# Altium PCB SX126xMB2xAS_e588v01a.PcbDoc
Units mm, origin at the board's own origin, x right, y up, seen from the top; angles counter-clockwise.
Board outline 65 x 53.3 mm, 4 copper layers (Top Layer, MidLayer1, MidLayer2, Bottom Layer), stack 0.986 mm thick; 56 components, 39 nets, 164 pads, 790 vias.
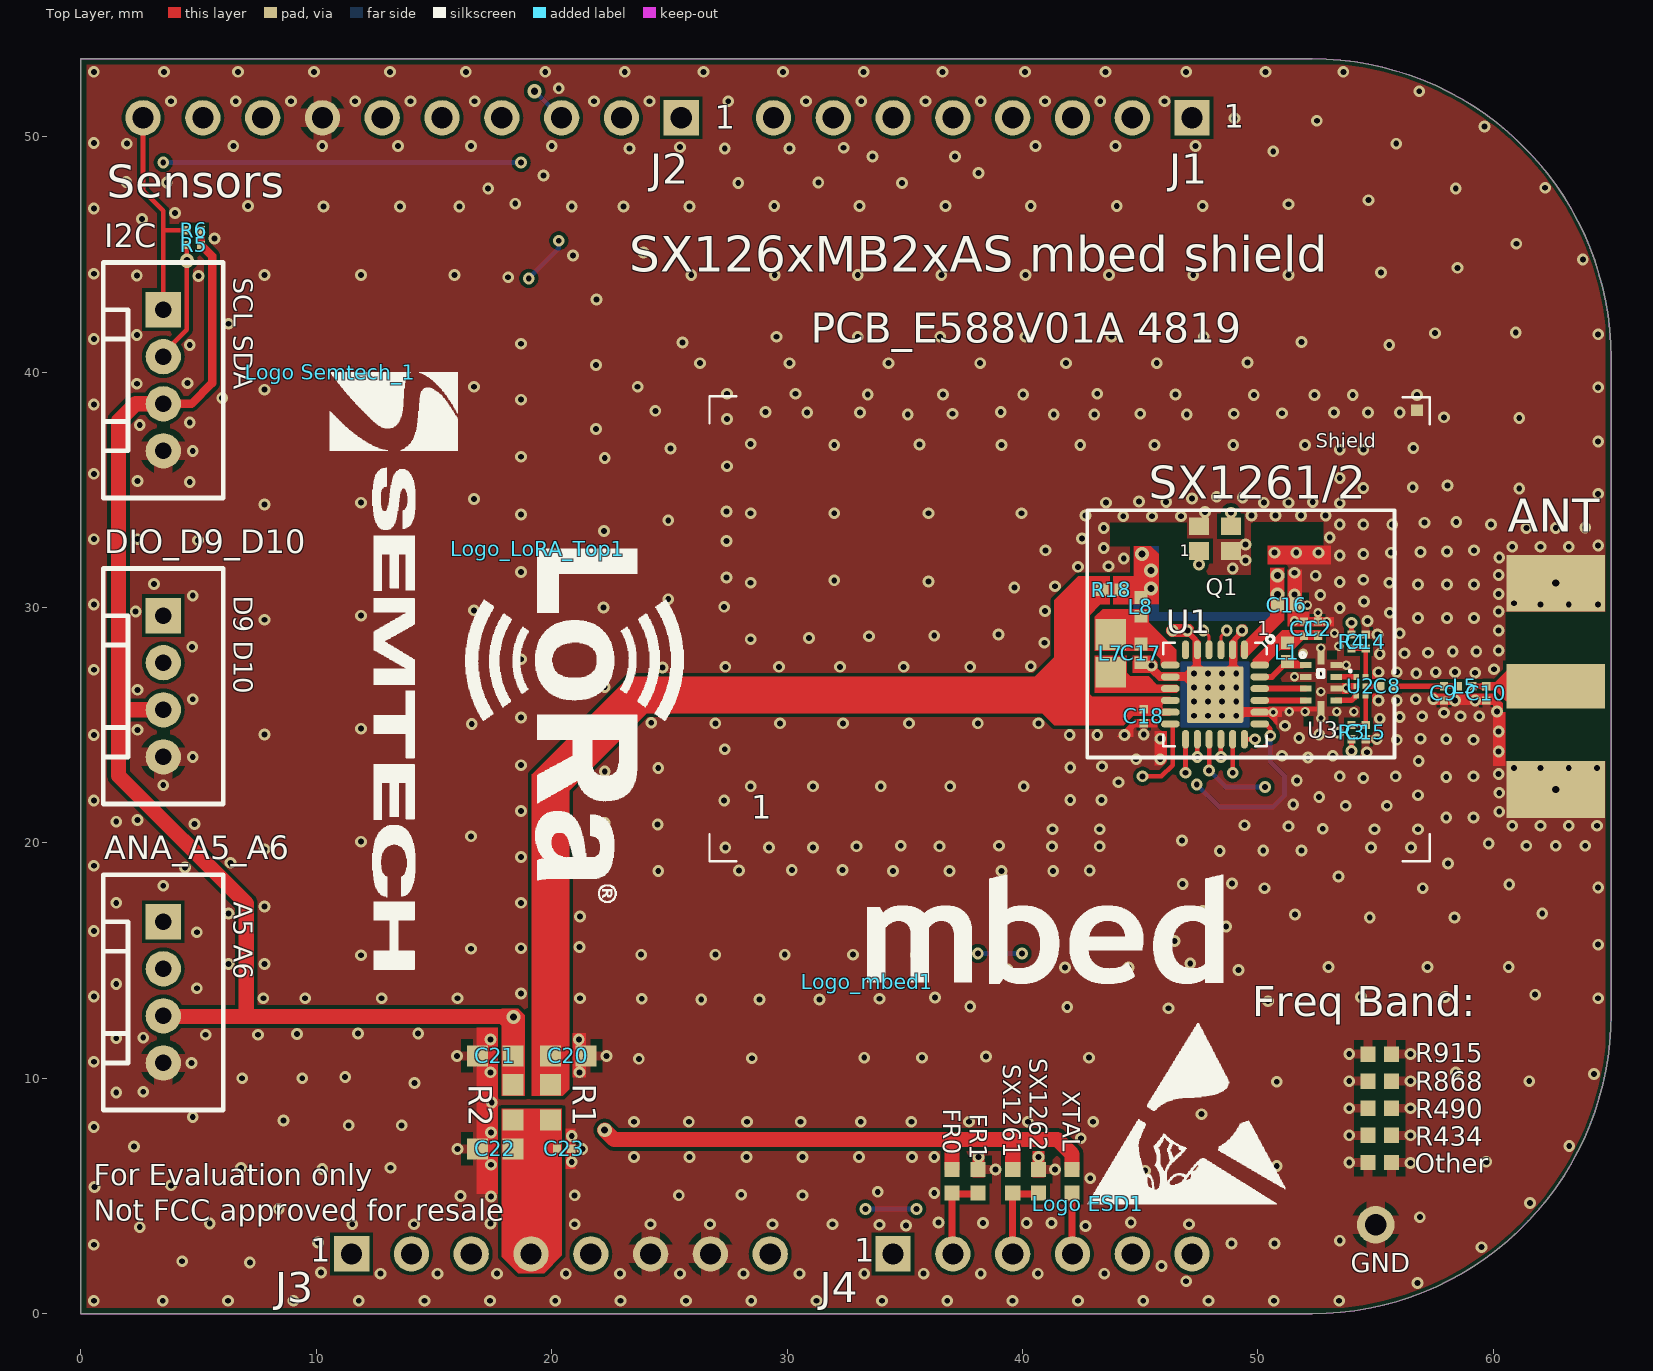
[diagram p0: Top Layer view]
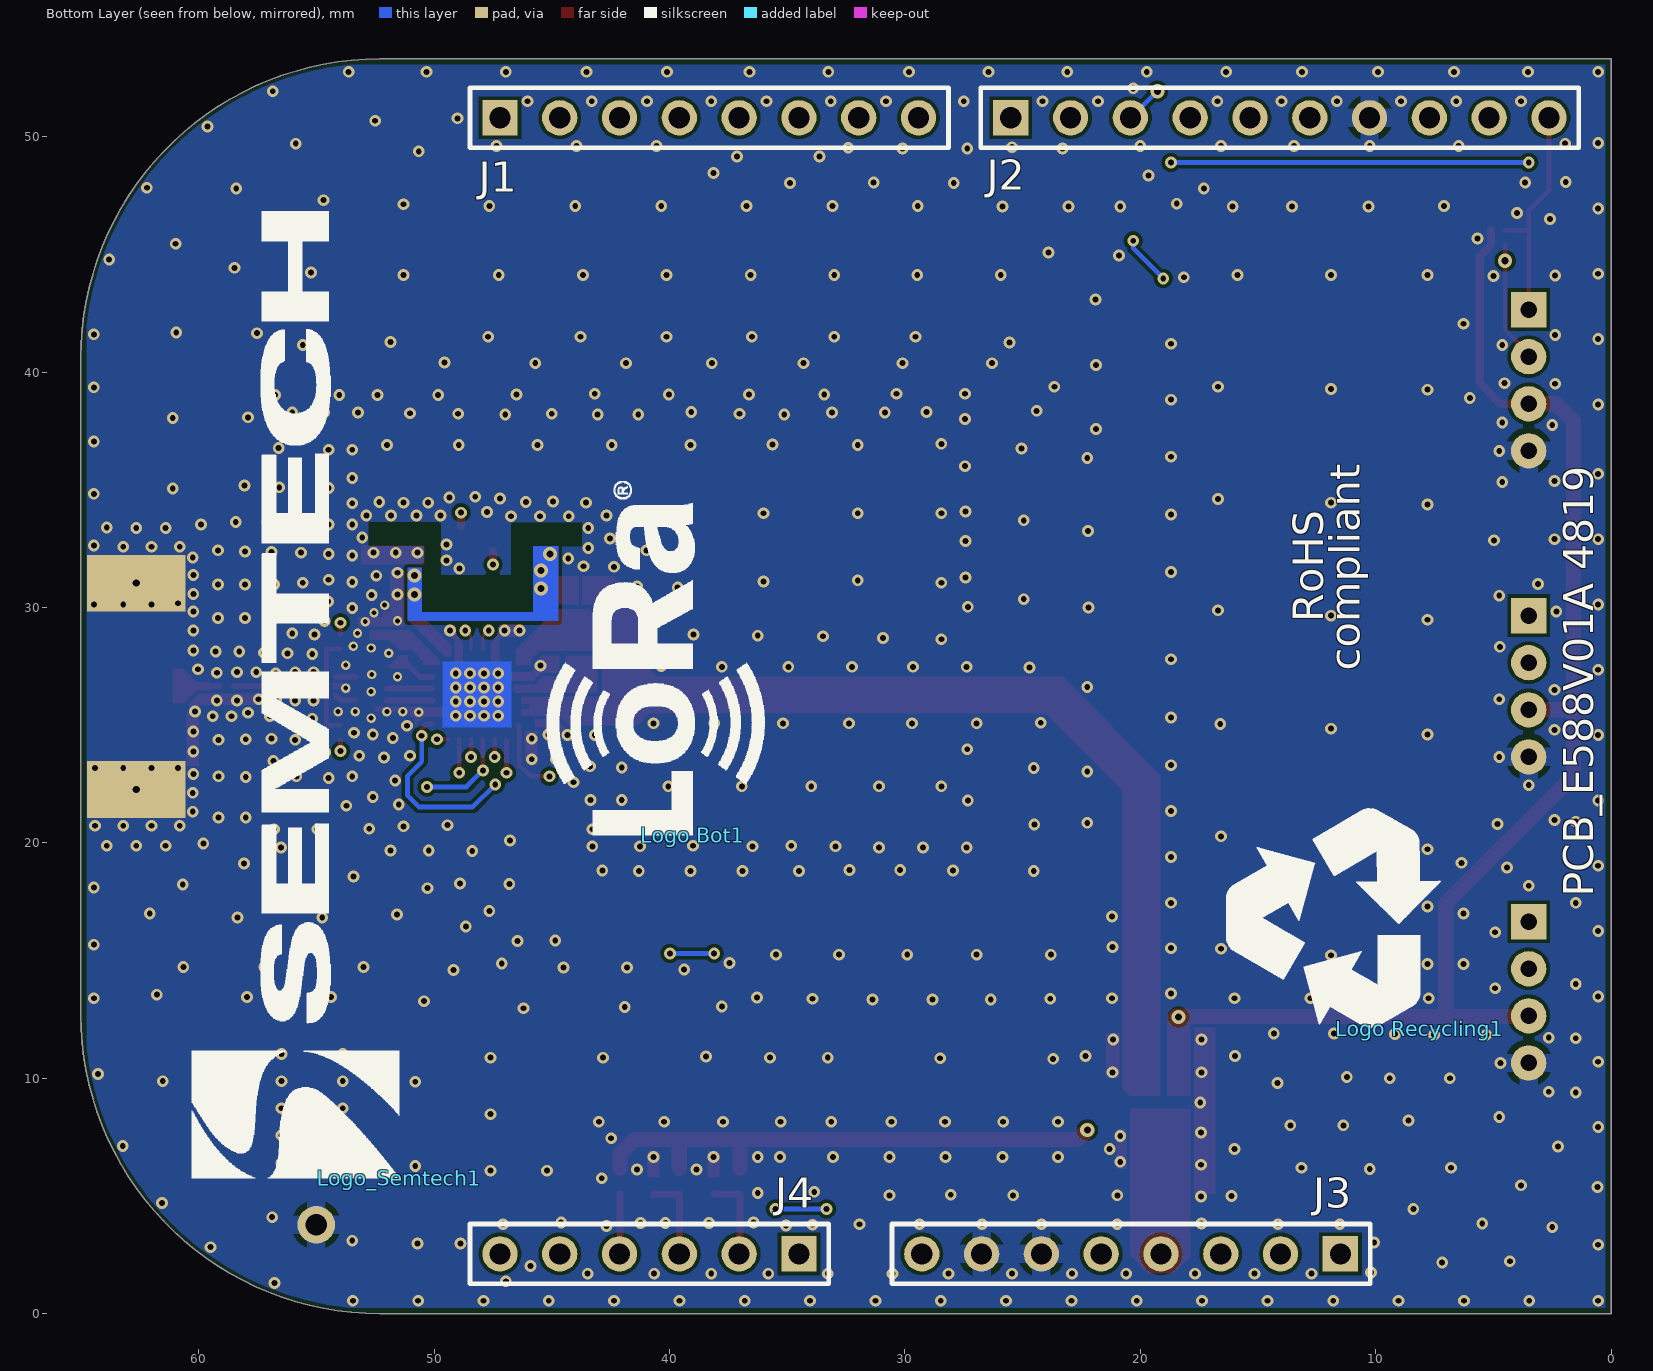
[diagram p1: Bottom Layer view, seen from below]
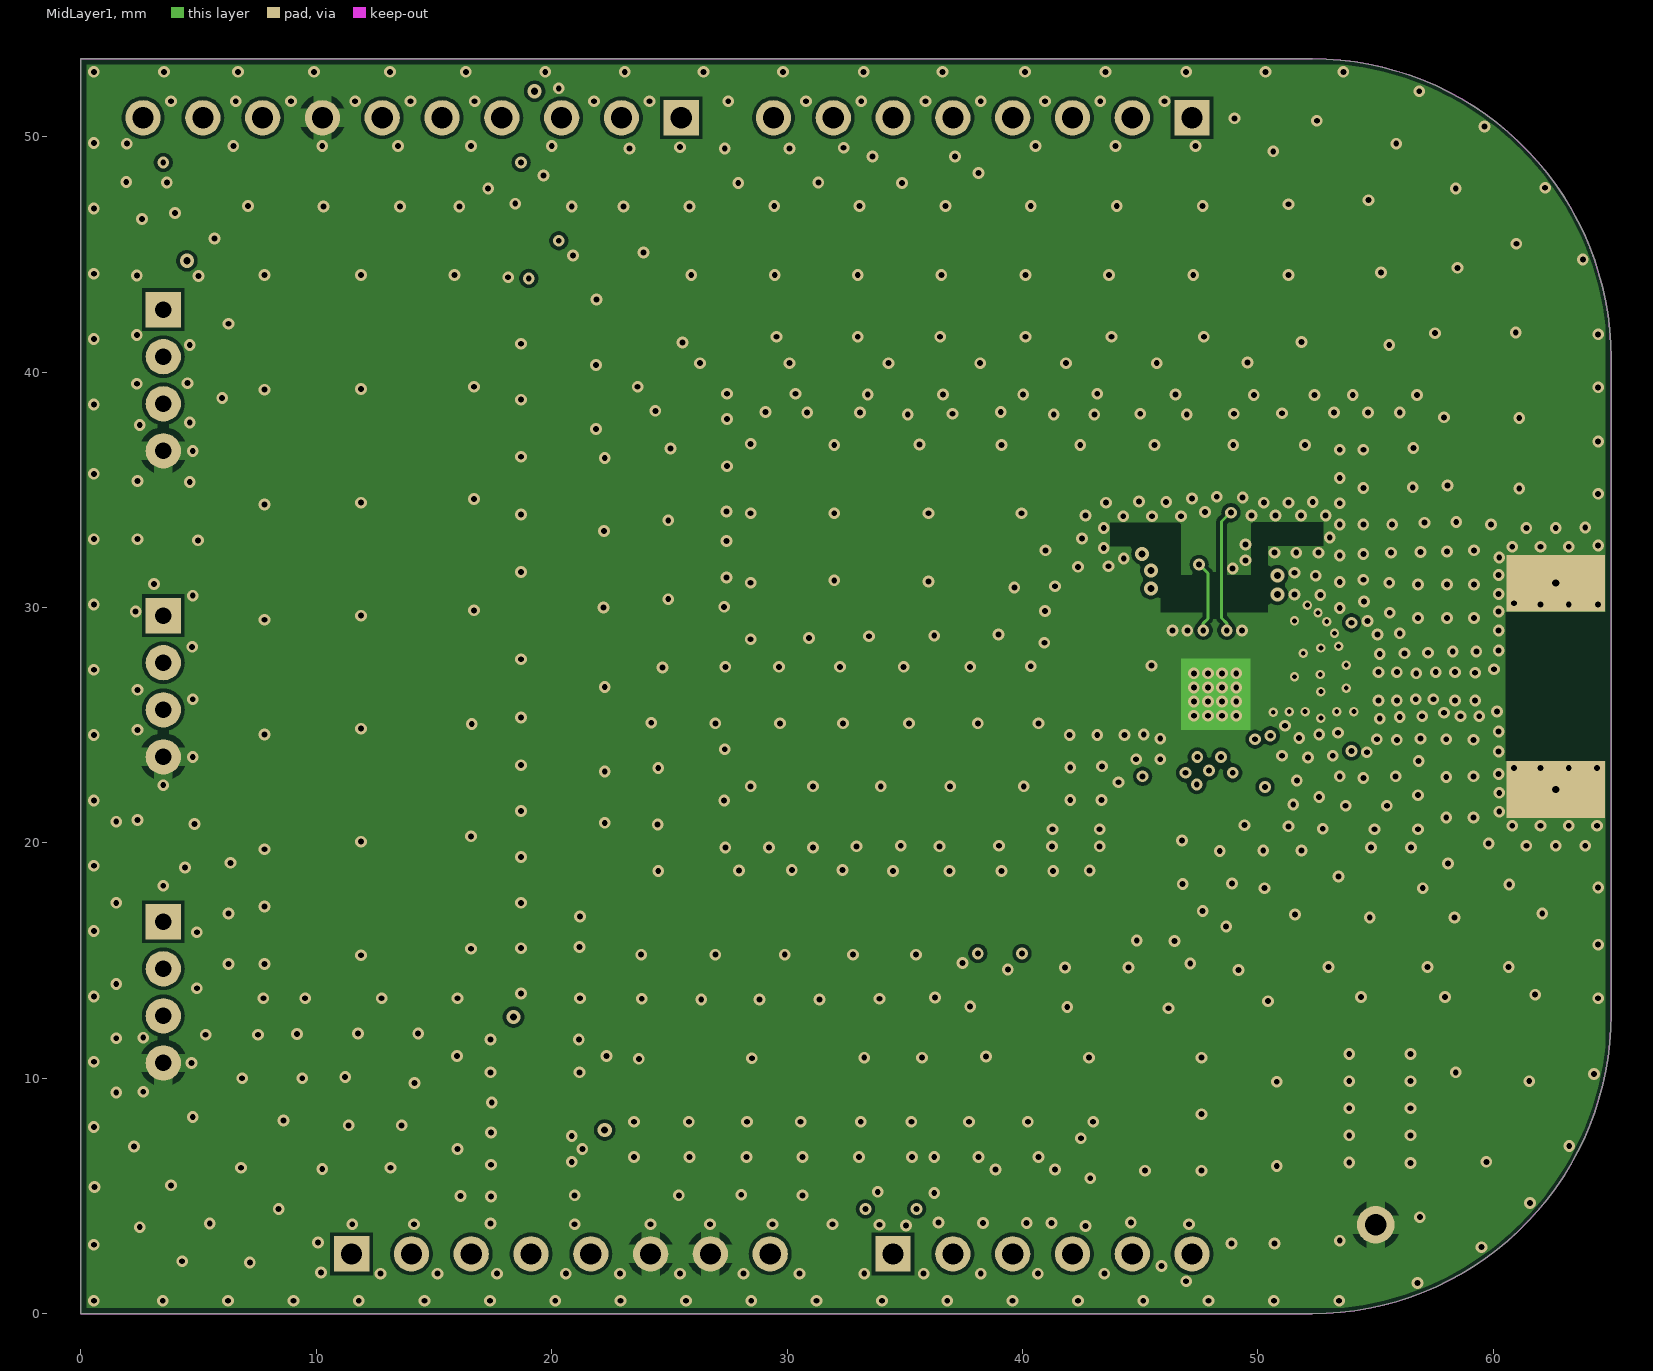
[diagram p2: MidLayer1]
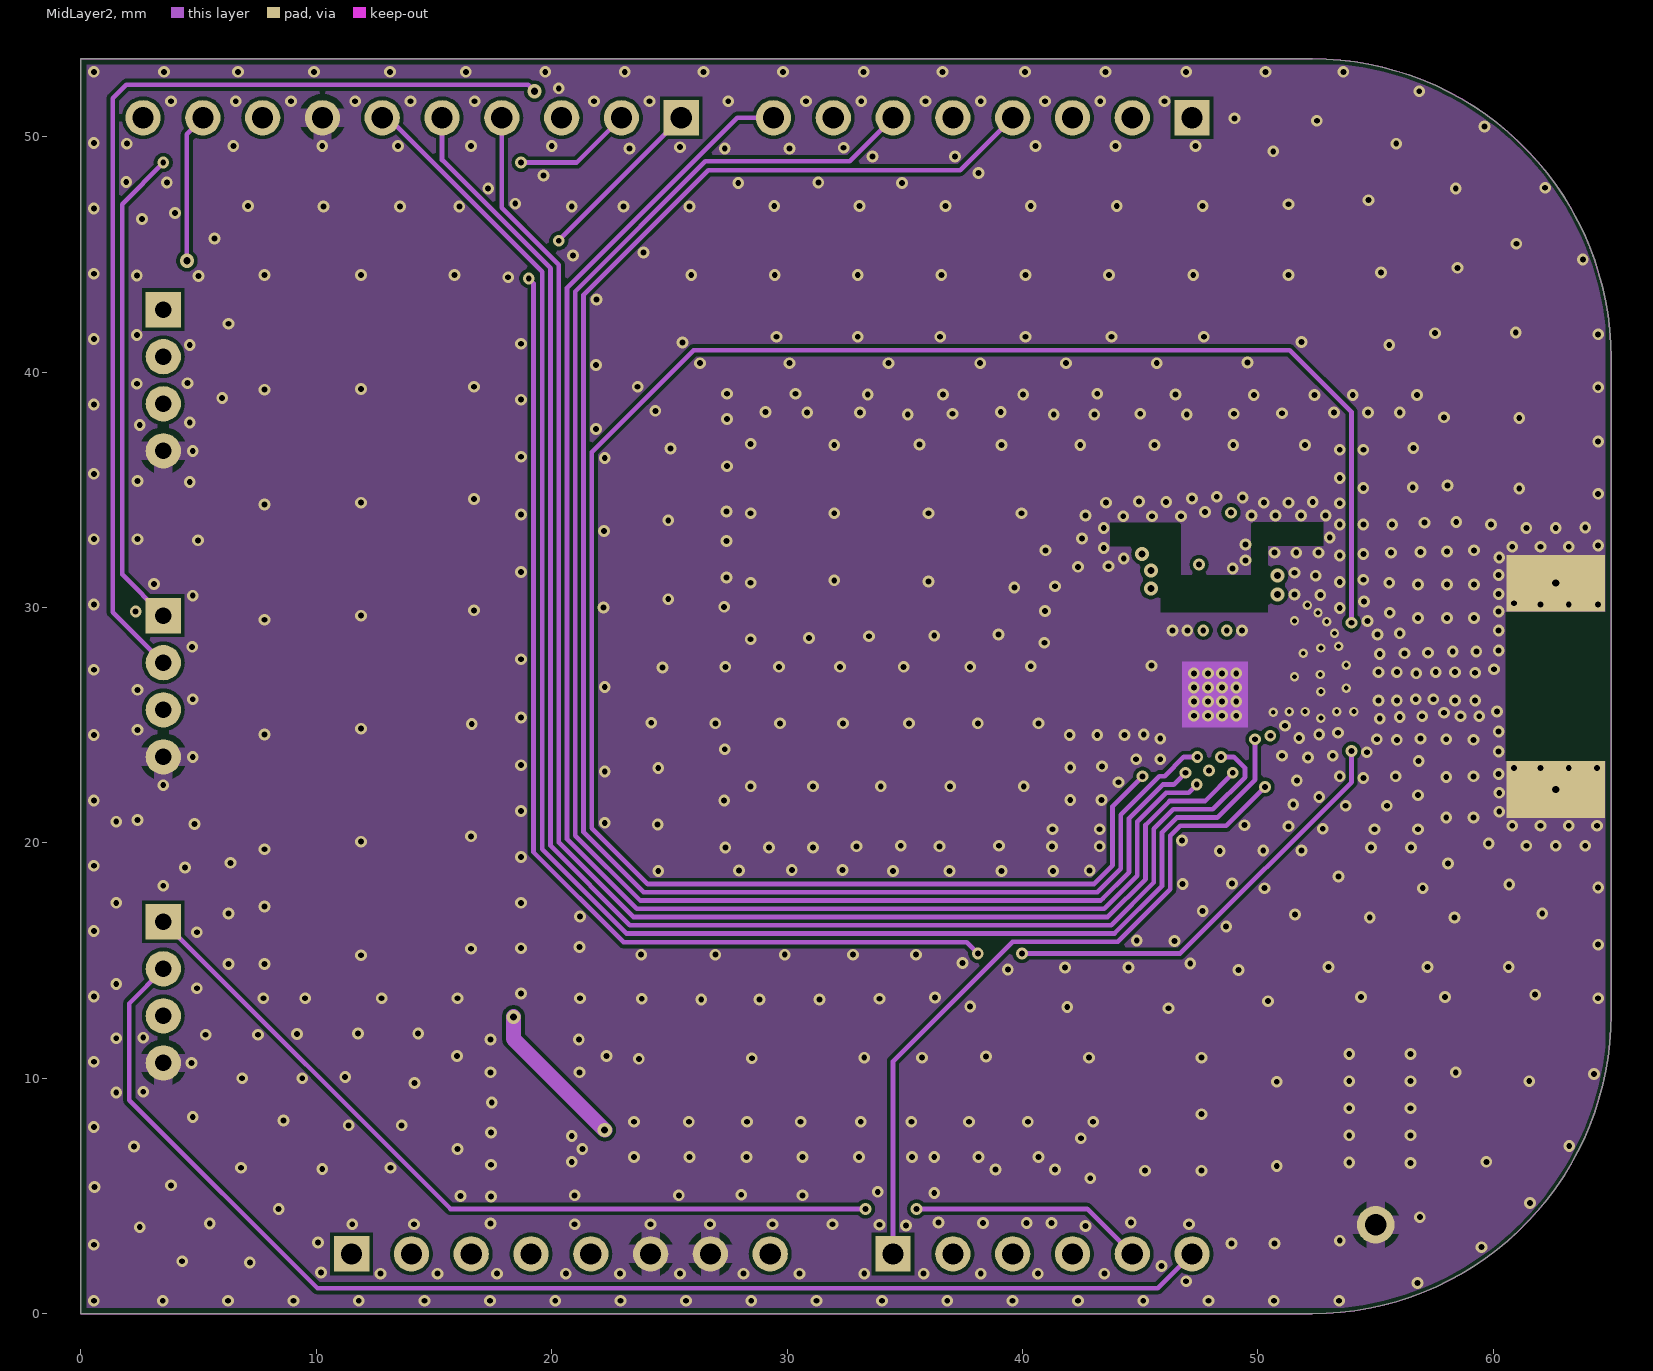
[diagram p3: MidLayer2]

## Layer stack, top to bottom
Top Solder: solder mask 0.0102, Solder Resist, Dk 3.5
Top Layer: signal copper 0.035
Dielectric1: core 0.15, FR-4, Dk 4.4
MidLayer1: signal copper 0.018
Dielectric3: prepreg 0.58, FR-4, Dk 4.4
MidLayer2: signal copper 0.018
Dielectric2: core 0.15, FR-4, Dk 4.4
Bottom Layer: signal copper 0.035
Bottom Solder: solder mask 0.0102, Solder Resist, Dk 3.5

## Board outline
0,0 52.3,0 ccw(c52.3,12.7) 65,12.7 65,40.6 ccw(c52.3,40.6) 52.3,53.3 0,53.3

## Design rules (kind name [scope] priority, off if disabled: settings)
Clearance Clearance_RF_GND [InNet('GND') And OnLayer('Top Layer') And (InPoly) vs InNet('NetL*') or InNet('NetC*') or InNet('NetU*') or InNet('NetA*') or InNet('VR_PA') or InNet('A*') or InNet('D*')] p1: gap=0.15 ignorepadtopadclearanceinfootprint=FALSE
Clearance Clearance_GND_Keepout [InNet('GND') vs OnLayer('Keep-Out Layer')] p2: gap=0.15 ignorepadtopadclearanceinfootprint=FALSE except(0: Arc-Hole Track-Hole SMDPad-Hole THPad-Hole Via-Hole Fill-Hole Poly-Hole Region-Hole Text-Hole)
Clearance Clearance_GND [InNet('GND')] p3: gap=0.15 ignorepadtopadclearanceinfootprint=FALSE
Clearance [All] p4: gap=0.15 ignorepadtopadclearanceinfootprint=FALSE except(0: Arc-Hole Track-Hole SMDPad-Hole THPad-Hole Via-Hole Fill-Hole Poly-Hole Region-Hole Text-Hole)
ComponentClearance ComponentClearance_SMA_RFIO [InComponent('RFIO')] p1: gap=0.1 collisioncheckmode=3 verticalgap=0.1 showdistances=FALSE
ComponentClearance [All] p2: gap=0.2 collisioncheckmode=3 verticalgap=0.3 showdistances=FALSE
HoleSize [All] p1: absolutevalues=TRUE maxlimit=3.6 minlimit=0.2 maxpercent=80.000 minpercent=20.000
HoleToHoleClearance [All] p1: gap=0.2 allowstackedmicrovias=TRUE
MinimumAnnularRing [All] p1: minimumring=0.1
MinimumSolderMaskSliver [All] p1: minsoldermaskwidth=0.04
PlaneClearance [All] p1: clearance=0.2
PlaneConnect [All] p1: planeconnectstyle=Direct reliefexpansion=0.508 reliefentries=4 reliefconductorwidth=0.254 reliefairgap=0.254
PolygonConnect PolygonConnect_SMD_0201 [InNet('GND') vs HasFootprint('rlc_201_smd_small') or  HasFootprint('rlc_201_smd') or  HasFootprint('TSNP-6-2')] p1: connectstyle=Relief reliefconductorwidth=0.35 reliefentries=4 polygonreliefangle="90 Angle" airgapwidth=0.125
PolygonConnect "PolygonConnect SMD" [InNet('GND') vs HasFootprint('rlc_603_smd_small') or HasFootprint('rlc_402_smd_small') or hasFootprint('rlc_805_smd_small') or HasFootprint('rlc_603_smd') or HasFootprint('rlc_402_smd') or hasFootprint('rlc_805_smd') or  hasFootprint('VQFN24_4X4MM')] p2: connectstyle=Relief reliefconductorwidth=0.4 reliefentries=4 polygonreliefangle="90 Angle" airgapwidth=0.254
PolygonConnect PolygonConnect_comp_diverse [InNet('GND') vs HasFootprint('LGM676 LED') or  HasFootprint('BRIDGE_254MM') or  HasFootprint('pin_0.9mm')  or  HasFootprint('1125S-4P_connector')   or  HasFootprint('vqfn20_3x3mm') or    HasFootprint('HDR1X8')  or  HasFootprint('HDR1X6') or  HasFootprint('HDR1X10')] p3: connectstyle=Relief reliefconductorwidth=0.8 reliefentries=4 polygonreliefangle="90 Angle" airgapwidth=0.254
PolygonConnect PolygonConnect_all [All] p4: connectstyle=Direct reliefconductorwidth=0.6 reliefentries=4 polygonreliefangle="90 Angle" airgapwidth=0.254
RoomDefinition SX126xMB2xAS_e588v01a [InComponentClass('SX126xMB2xAS_e588v01a')] p1: confinementstyle=ConfineOut formatcopy=TRUE lockcomponents=FALSE outline -10.5,78.325 -10.55,78.375 -10.55,121.325 43.45,121.325 43.3,121.175 43.3,78.325
RoutingVias [All] p1: holewidth=0.25 width=0.5 viastyle="Through Hole" minholewidth=0.2 minwidth=0.4 maxholewidth=0.3 maxwidth=0.6
SilkToSilkClearance [All] p1: silktosilkclearance=0.05
SilkToSolderMaskClearance SilkscreenOverComponentPads [IsPad] p1: minsilkscreentomaskgap=0.05 clearancetoexposedcopper=TRUE
SolderMaskExpansion [All] p1: expansion=0.05
Width "Width GND" [InNet('GND')] p1: maxlimit=3 minlimit=0.2 preferedwidth=0.4
Width Width_VCC [InNet('VDD') or  InNet('VDISPLAY') or  InNet('VDD_MBED')  or  InNet('VUSB')  or  InNet('VDD_3V3')] p2: maxlimit=2 minlimit=0.2 preferedwidth=0.8
Width "Width All" [All] p3: maxlimit=2 minlimit=0.127 preferedwidth=0.2
22 further rules are at their usual default settings.

## Components (designator, comment, footprint, x,y, rotation, side; value= is the part's Value field where it differs from the comment)
ANA_A5_A6 "Header 4" 1125S-4P_connector 3.5,16.65 r270 top locked
ANT "SMA" SMA_end_launch_1.0mm_9.52mm 62.65,26.65 r0 top locked
C1 "Cap" rlc_201_smd 51.95,29.1 r270 top value=VAL?
C2 "Cap" RLC_201_SMD 52.55,29.1 r270 top value=VAL?
C8 "Cap" RLC_201_SMD 55.5,26.65 r180 top value=VAL?
C9 "Cap" rlc_201_smd 57.9,26.35 r90 top value=VAL?
C10 "Cap" rlc_201_smd 59.7,26.35 r90 top value=VAL?
C14 "Cap" RLC_201_SMD 54.575,28.55 r90 top value=1nF
C15 "Cap" RLC_201_SMD 54.575,24.7 r270 top value=1nF
C16 "Cap" rlc_402_smd_small 51.225,30.1 r180 top value=VAL?
C17 "Cap" rlc_402_smd_small 45.025,28.05 r90 top value=470nF
C18 "Cap" RLC_201_SMD 45.15,25.375 r90 top value=100nF
C20 "Cap" RLC_603_SMD 20.7,10.95 r180 top value=1uF
C21 "Cap" RLC_603_SMD 17.6,10.95 r0 top value=1uF
C22 "Cap" RLC_603_SMD 17.6,7 r0 top value=10uF
C23 "Cap" RLC_201_SMD 20.525,7 r180 top value=100nF
DIO_D9_D10 "Header 4" 1125S-4P_connector 3.5,29.65 r270 top locked
FR0 "Resistor" RLC_402_SMD 37,5.625 r270 top value=1k
FR1 "Resistor" RLC_402_SMD 38.111,5.625 r270 top value=NC
GND "Test Pin" pin_0.9mm 51.45,9.775 r90 top
I2C "Header 4" 1125S-4P_connector 3.5,42.65 r270 top locked
J1 "Header 8" HDR1X8 47.2,50.8 r180 bottom locked
J2 "Header 10" HDR1X10 25.5,50.8 r180 bottom locked
J3 "Header 8" HDR1X8 11.5,2.54 r0 bottom locked
J4 "Header 6" HDR1X6 34.5,2.54 r0 bottom locked
L1 "Inductor" rlc_402_smd_small 51.25,28.1 r90 top value=VAL?
L5 "Inductor" rlc_201_smd 58.8,26.65 r0 top value=VAL?
L7 "Inductor" rlc_805_smd_small 43.75,28.05 r270 top value=15uH
L8 "Inductor" rlc_402_smd_small 45.025,30.025 r270 top value=VAL?
"Logo Bot1" "Logo symbol" "Logo LoRa Size4" 39,20.325 r90 bottom
"Logo ESD1" "Logo symbol" "Logo ESD" 42.775,4.674 r0 top
"Logo Recycling1" "Logo symbol" "Logo Recycling1" 8.125,12.1 r90 bottom
"Logo Semtech_1" "Logo symbol" logo_semtech_horiz_size3 10.6,40 r270 top locked
Logo_LoRA_Top1 "Logo symbol" "Logo LoRa Size4" 19.4,32.5 r270 top locked
Logo_mbed1 "Logo symbol" "logo mbed 2" 33.4,14.1 r0 top
Logo_Semtech1 "Logo symbol" logo_semtech_horiz_size4 51.475,5.75 r90 bottom
Other "Resistor" RLC_402_SMD 55.175,6.425 r180 top value=NC
Q1 "Xtal" nd2016da 48.175,32.925 r0 top value=32.0MHz
R1 "Resistor" RLC_603_SMD 19.95,8.975 r270 top value=0R
R2 "Resistor" RLC_603_SMD 18.35,8.975 r270 top value=0R
R3 "Resistor" RLC_201_SMD 53.975,24.7 r270 top value=100R
R4 "Resistor" RLC_201_SMD 53.975,28.55 r90 top value=100R
R5 "Resistor" RLC_201_SMD 4.8,45.4 r0 top value=3.3k
R6 "Resistor" RLC_201_SMD 4.8,46.025 r0 top value=3.3k
R18 "Resistor" rlc_402_smd_small 43.775,30.75 r180 top value=0R
R434 "Resistor" RLC_402_SMD 55.175,7.575 r0 top value=NC
R490 "Resistor" RLC_402_SMD 55.175,8.725 r180 top value=NC
R868 "Resistor" RLC_402_SMD 55.175,9.875 r0 top value=NC
R915 "Resistor" RLC_402_SMD 55.175,11.025 r180 top value=NC
Shield "Logo symbol" "BMIS-209-F - Shield" 56.75,38.375 r180 top locked
SX1261 "Resistor" RLC_402_SMD 39.58,5.625 r270 top value=NC
SX1262 "Resistor" RLC_402_SMD 40.675,5.625 r270 top value=10k
U1 "SX1261/2" VQFN24_4X4MM 48.175,26.3 r270 top
U2 "BGS12SN6 RF Switch" TSNP-6-2 54.375,26.65 r0 top
U3 "0900FM15D0039" "IPD FILTER" 52.675,26.8 r270 top
XTAL "Resistor" RLC_402_SMD 42.1,5.625 r270 top value=1k

## Footprints (in the part's own frame and the unit in brackets; to place one, negate y for a bottom-side part, rotate by r counter-clockwise, add the part's x,y. Pads: shape width x height; smd on the part's side, far side on the other; paste and mask are expansions set on the pad)
1125S-4P_connector [mm] "Connector; Header; 4 Position; P/N: 1125S-4P; Manuf: TAIFENG"
  rect 1.5x1.5 hole 0.7 mask+0.05: 1(0,0)
  round 1.5 hole 0.7 mask+0.05: 2(2,0) 3(4,0) 4(6,0)
  silkscreen extent -2,-2.55 8,2.55, body extent -2,-2.55 8,2.55, height 2.95
"BMIS-209-F - Shield" [mm] "BMIS-209-F EMI Gasket - modif SolderMask - Standard Surface Mount Shields -  Laird Technologies"
  rect 0.5x0.5 smd paste-1 mask+0.05: 1(0,0)
  Mechanical 15 keep-out lines w1: 29.5,18.6 29.5,0 0,0 0,18.6 29.5,18.6
  silkscreen extent -0.55,-0.6 30.05,19.15, body extent -0.3,-0.3 0.3,0.3, height 0.8
HDR1X6 [mm] "Connector; Header; 6 Position"
  rect 1.5x1.5 hole 0.9: 1(0,0)
  round 1.5 hole 0.9: 2(2.54,0) 3(5.08,0) 4(7.62,0) 5(10.16,0) 6(12.7,0)
  silkscreen extent -1.27,-1.27 13.97,1.27, body extent -0.8,-0.8 13.5,0.8
HDR1X8 [mm] "Connector; Header; 8 Position"
  rect 1.5x1.5 hole 0.9: 1(0,0)
  round 1.5 hole 0.9: 2(2.54,0) 3(5.08,0) 4(7.62,0) 5(10.16,0) 6(12.7,0) 7(15.24,0) 8(17.78,0)
  silkscreen extent -1.27,-1.27 19.05,1.27, body extent -0.8,-0.8 18.58,0.8
HDR1X10 [mm] "Connector; Header; 10 Position"
  rect 1.5x1.5 hole 0.9: 1(0,0)
  round 1.5 hole 0.9: 2(2.54,0) 3(5.08,0) 4(7.62,0) 5(10.16,0) 6(12.7,0) 7(15.24,0) 8(17.78,0) 9(20.32,0) 10(22.86,0)
  silkscreen extent -1.27,-1.27 24.13,1.27, body extent -0.8,-0.8 23.66,0.8
"IPD FILTER" [mm] "IPD Filter; Johanson; Body 2.00 x 1.25 mm (LxW max)"
  rect 0.25x0.5 smd mask+0.025: 1(-0.75,-0.65) 2(-0.25,-0.65) 3(0.25,-0.65) 4(0.75,-0.65) 6(0.75,0.65) 7(0.25,0.65) 8(-0.25,0.65) 9(-0.75,0.65)
  rect 0.6x0.3 smd mask+0.025: 5(1.075,0) 10(-1.075,0)
  silkscreen extent -1.27,-0.87 -0.23,0.12, body extent -1,-0.63 1,0.63, height 0.6
"Logo ESD" [mm] "Logo ESD"
  silkscreen extent 0,0 8.38,7.67
"Logo LoRa Size4" [mm] "Logo LoRa Size4 - Top Overlay - 18x9.5mm - Registered"
  silkscreen extent 0,-3.05 15.04,6.2
"logo mbed 2" [mm] "logo mbed 2"
  silkscreen extent 0,-0.06 15.12,4.54
"Logo Recycling1" [mm] "Logo Recycling1"
  silkscreen extent 0.05,-0.88 9.36,8.2
logo_semtech_horiz_size3 [mm] "Logo semtech horizontal - size3 - L"
  silkscreen extent 0,0 25.4,5.41
logo_semtech_horiz_size4 [mm] "Logo semtech horizontal - size4 - XL"
  silkscreen extent 0,0 41.07,8.79
nd2016da [mm] "Crystal SMD 2.0x1.6mm"
  rect 0.85x0.75 smd mask+0.05: 1(-0.675,-0.525) 2(0.675,-0.525) 3(0.675,0.525) 4(-0.675,0.525)
  body extent -1,-0.8 1,0.8, height 1
pin_0.9mm [mm] "Generic Pin 0.9mm; 1 Lead"
  round 1.6 hole 0.9 mask+0.05: 1(-6,-3.55)
rlc_201_smd [mm] "Chip SMD component 201; Body 0.6 x 0.3 mm (LxW typ)"
  rect 0.35x0.35 smd paste+0 mask+0.025: 1(-0.3,0) 2(0.3,0)
  body extent -0.3,-0.15 0.3,0.15, height 0.5
RLC_201_SMD [mm] "Chip SMD component 201; Body 0.6 x 0.3 mm (LxW typ)"
  rect 0.35x0.35 smd paste+0 mask+0.025: 1(-0.3,0) 2(0.3,0)
  body extent -0.3,-0.15 0.3,0.15, height 0.5
RLC_402_SMD [mm] "Chip SMD component 402; Body 1.0 x 0.5 mm (LxW typ)"
  rect 0.65x0.65 smd mask+0.05: 1(-0.5,0) 2(0.5,0)
  body extent -0.5,-0.25 0.5,0.25, height 0.6
rlc_402_smd_small [mm] "Chip SMD component 402; Body 1.0 x 0.5 mm (LxW typ);small footprint"
  rect 0.55x0.55 smd mask+0.025: 1(-0.4,0) 2(0.4,0)
  body extent -0.5,-0.25 0.5,0.25, height 0.6
RLC_603_SMD [mm] "Chip SMD component 603; Body 1.6 x 0.8mm (LxW typ)"
  rect 0.9x0.9 smd paste+0 mask+0.05: 1(-0.75,0) 2(0.75,0)
  body extent -0.8,-0.4 0.8,0.4, height 0.9
rlc_805_smd_small [mm] "Chip SMD component 805; Body 2.0 x 1.25 mm (LxW typ); small footprint"
  rect 1.3x1.3 smd mask+0.05: 1(-0.8,0) 2(0.8,0)
  body extent -1,-0.63 1,0.63, height 1
SMA_end_launch_1.0mm_9.52mm [mm] "SMA end launch for 1.0mm PCB thickness; 9.52mm"
  rect 4.2x1.905 smd mask+0.05: 1(0,0)
  rect 4.2x2.413 hole 0.3 mask+0.05: 2(0,-4.38) 2(0,4.38)
TSNP-6-2 [mm] "TSNP-6-2; Body 1.1 x 0.7 mm (LxW typ)"
  rect 0.25x0.25 smd paste-0.025 mask+0.025: 1(-0.2,0.4) 2(-0.2,0) 3(-0.2,-0.4) 4(0.2,-0.4) 5(0.2,0) 6(0.2,0.4)
  silkscreen extent -0.5,0.6 -0.4,0.7, body extent -0.35,-0.55 0.35,0.55, height 0.45
VQFN24_4X4MM [mm] "24 Leads, Body 4.0x4.0mm, Pitch 0.50mm, VQFN24"
  oval 0.8x0.3 smd mask+0.05: 1(-1.9,1.25) 2(-1.9,0.75) 3(-1.9,0.25) 4(-1.9,-0.25) 5(-1.9,-0.75) 6(-1.9,-1.25) 13(1.9,-1.25) 14(1.9,-0.75) 15(1.9,-0.25) 16(1.9,0.25) 17(1.9,0.75) 18(1.9,1.25)
  oval 0.3x0.8 smd mask+0.05: 7(-1.25,-1.9) 8(-0.75,-1.9) 9(-0.25,-1.9) 10(0.25,-1.9) 11(0.75,-1.9) 12(1.25,-1.9) 19(1.25,1.9) 20(0.75,1.9) 21(0.25,1.9) 22(-0.25,1.9) 23(-0.75,1.9) 24(-1.25,1.9)
  rrect5% 2.4x2.4 smd paste-2.5 mask+0.05: 25(0,0)
  Mechanical 15 keep-out lines w0.1: 2.5,-2.5 2.5,2.5 -2.5,2.5 -2.5,-2.5 2.5,-2.5
  silkscreen extent -2.5,-2.2 2.2,2.5, body extent -2,-2 2,2, height 1

## Part data
ANA_A5_A6 DIO_D9_D10 I2C: "Header, 4-Pin", LatestRevisionDate=17-Jul-2002, LatestRevisionNote="Re-released for DXP Platform.", Publisher="Altium Limited"
ANT: "SMA Straight Connector", LatestRevisionDate="05-oct-2007  -  Semtech", LatestRevisionNote="Re-released for DXP Platform.", Publisher="Altium Limited"
C1 C2 C8 C9 C10 C14 C15 C16 C17 C18 C20 C21 C22 C23: "Capacitor SMD", LatestRevisionDate="05-oct-2007  -  Semtech", LatestRevisionNote="Re-released for DXP Platform.", Published=8-Jun-2000, Publisher="Altium Limited"
FR0 FR1 Other R1 R2 R3 R4 R5 R6 R18 R434 R490 R868 R915 SX1261 SX1262 XTAL: "Resistor SMD - IEC symbol version", LatestRevisionDate="27-Jul-20  -  Semtech"
GND: library part test_pin, LatestRevisionDate="05-oct-2007  -  Semtech"
J1 J3: "Header, 8-Pin", LatestRevisionDate=17-Jul-2002, LatestRevisionNote="Re-released for DXP Platform.", Publisher="Altium Limited"
J2: "Header, 10-Pin", LatestRevisionDate=17-Jul-2002, LatestRevisionNote="Re-released for DXP Platform.", Publisher="Altium Limited"
J4: "Header, 6-Pin", LatestRevisionDate=17-Jul-2002, LatestRevisionNote="Re-released for DXP Platform.", Publisher="Altium Limited"
L1 L5 L7 L8: "Inductor SMD", Code_IEC=1005, Code_JEITA=0402, LatestRevisionDate="05-oct-2007  -  Semtech", LatestRevisionNote="Re-released for DXP Platform.", Published=8-Jun-2000, Publisher="Altium Limited"
"Logo Bot1" "Logo ESD1" "Logo Recycling1" "Logo Semtech_1" Logo_LoRA_Top1 Logo_mbed1 Logo_Semtech1: library part Logo, "Schematic symbol for Logo"
Q1: library part "Xtal GND", "Crystal with GND pins", LatestRevisionDate="05-oct-2007  -  Semtech"
Shield: library part Shield, "Shield - EMI Gasket - Standard Surface Mount Shields"
U1: library part SX126x, "SX1262- Ultra low power RF transceiver"
U2: "BGS12SN6 Infineon RF Switch", LatestRevisionDate="03-Sep-2012 -  Semtech"
U3: library part "IPD filter", "0900FM15D0039 - Johanson IPD Filter for SX1261, SX1262", LatestRevisionDate="05-oct-2007  -  Semtech"

## Via types
v1: diameter 0.5, hole 0.25, Top Layer to Bottom Layer, tented both sides, 762 vias
v2: diameter 0.4, hole 0.2, Top Layer to Bottom Layer, tented both sides, 19 vias
v3: diameter 0.6, hole 0.3, Top Layer to Bottom Layer, tented both sides, 9 vias

## Nets (pads, with @x,y where several pads share a name; then routed paths per layer and width w, separated by ;. In a path a pad name is that pad's centre, name@x,y a point inside that pad or via, vN(x,y) a via of type N, cw(c..) or ccw(c..) an arc to the next point about the centre after c; other vN are vias at no path point)
A5: ANA_A5_A6.1 J4.5 | length 47
  Top Layer w0.2: v1(35.5,4.45) v1@35.5,4.475
  MidLayer2 w0.2: ANA_A5_A6.1 15.7,4.45 v1(33.325,4.45) ; v1(35.5,4.45) 42.75,4.45 J4.5@44.65,2.55
  Bottom Layer w0.2: v1(33.325,4.45) v1(35.5,4.45)
A6: ANA_A5_A6.2 J4.6 | length 55.3
  MidLayer2 w0.2: ANA_A5_A6.2@3.525,14.65 2.05,13.175 2.05,9.075 10.05,1.075 45.735,1.075 J4.6
ANT_SW: J2.1 R3.2 | length 75.4
  Top Layer w0.2: v1(53.975,23.9) R3.2
  MidLayer2 w0.2: v1(19.025,43.975) 19.225,43.775 19.225,19.6 23.05,15.775 37.625,15.775 v1(38.1,15.3) v1@38.05,15.3 ; v1(20.3,45.575) 20.3,45.6 J2.1 ; v1(39.975,15.3) 46.7,15.3 53.975,22.575 v1(53.975,23.9)
  Bottom Layer w0.2: v1@19.025,44 v1(19.025,43.975) 20.3,45.25 v1(20.3,45.575) ; v1(38.1,15.3) v1(39.975,15.3)
BUSY: J1.4 U1.14 | length 75.9
  Top Layer w0.2: v1@47.425,23.575 U1.14
  MidLayer2 w0.2: J1.4 37.355,48.575 26.65,48.575 21.35,43.275 21.35,20.45 23.9,17.9 43.175,17.9 43.244,17.969 ; 43.18,17.9 44.175,18.895 44.175,21.193 45.807,22.825 46.032,22.825 46.857,23.65 v1(47.425,23.65)
D9: DIO_D9_D10.1 J2.2 | length 41
  MidLayer2 w0.2: DIO_D9_D10.1 1.75,31.4 1.75,47.125 v1@3.55,48.925 ; v1(18.7,48.9) 21.06,48.9 22.95,50.79 J2.2@22.95,50.8
  Bottom Layer w0.2: v1(3.5,48.9) v1(18.7,48.9)
D10: DIO_D9_D10.2 J2.3 | length 44.9
  MidLayer2 w0.2: DIO_D9_D10.2@3.5,27.796 DIO_D9_D10.2 1.35,29.8 1.35,51.625 1.925,52.2 19,52.2 v3(19.275,51.925)
  Bottom Layer w0.2: v3(19.275,51.925) 19.285,51.925 20.41,50.8 J2.3
DIO1: J1.6 U1.13 | length 71.9
  Top Layer w0.2: v1(46.925,22.975) U1.13
  MidLayer2 w0.2: J1.6 32.65,48.95 26.53,48.95 21,43.42 21,20.305 23.755,17.55 43.325,17.55 ; 43.422,17.647 43.325,17.55 ; v1(46.925,22.975) 46.425,22.475 45.952,22.475 44.525,21.048 44.525,18.75 43.325,17.55
DIO2: R4.2 U1.12 | length 91.5
  Top Layer w0.2: v1(45.1,22.825) 45.9,22.825 46.375,23.3 46.375,24.95 U1.12@46.413,24.988 ; R4.2 v1(53.975,29.35)
  MidLayer2 w0.2: 43.035,18.25 43.025,18.25 ; v1(45.1,22.825) 43.825,21.55 43.825,19.05 43.025,18.25 ; v1(53.975,29.35) 53.975,38.3 51.35,40.925 26.025,40.925 21.7,36.6 21.7,20.625 24.075,18.25 43.025,18.25
DIO3: U1.6
GND: ANA_A5_A6.4 ANT.2 C1.1 C2.1 C9.1 C10.1 C14.2 C15.2 C16.1 C17.1 C18.1 C20.1 C21.1 C22.1 C23.1 DIO_D9_D10.4 FR1.1 GND.1 I2C.4 J2.7 J3.6 J3.7 Other.1 Other.2 Q1.2 Q1.4 R434.1 R434.2 R490.1 R490.2 R868.1 R868.2 R915.1 R915.2 Shield.1 SX1262.1 U1.2 U1.5 U1.8 U1.20 U1.25 U2.2 U3.2 U3.5 U3.7 U3.9 U3.10 | length 0.1
  Top Layer w0.3: U1.25@49.075,25.5 U1.25@49.125,25.55
  other v1: 0.55,0.55 3.475,0.55 6.25,0.55 9.025,0.55 11.8,0.55 14.6,0.55 17.375,0.55 20.15,0.55 22.925,0.55 25.7,0.55 28.475,0.55 31.25,0.55 34.025,0.55 36.8,0.55 39.575,0.55 42.35,0.55 45.125,0.55 47.9,0.55 50.675,0.55 53.45,0.55 56.775,1.3 46.95,1.375 12.725,1.7 15.15,1.7 17.675,1.7 20.6,1.7 22.9,1.7 25.45,1.7 28.15,1.7 30.525,1.7 33.275,1.7 35.8,1.7 38.225,1.7 40.65,1.7 43.475,1.7 10.2,1.75 45.9,2.025 7.175,2.175 4.3,2.225 59.5,2.825 0.55,2.925 48.875,2.975 50.7,2.975 10.075,3.025 53.475,3.1 2.5,3.675 42.675,3.725 35.05,3.75 33.925,3.775 11.525,3.8 14.15,3.8 20.975,3.8 24.2,3.8 26.725,3.8 29.375,3.8 31.925,3.8 47.075,3.8 5.475,3.825 17.4,3.825 38.325,3.85 40.175,3.85 41.225,3.85 36.425,3.875 44.6,3.875 56.875,4.1 8.4,4.45 61.55,4.7 17.425,4.975 16.125,5 20.975,5.025 25.4,5.025 30.65,5.025 28.05,5.05 36.25,5.125 33.85,5.175 0.575,5.375 3.825,5.45 42.875,5.75 45.2,6.075 47.6,6.075 38.85,6.125 41.375,6.125 10.25,6.15 6.8,6.2 13.15,6.2 50.8,6.275 17.425,6.325 56.475,6.4 53.875,6.425 20.85,6.45 59.7,6.45 23.5,6.65 25.85,6.65 28.275,6.65 30.65,6.65 33.05,6.65 35.3,6.65 36.25,6.65 38.125,6.65 40.675,6.65 16,7 21.3,7 2.25,7.1 63.225,7.125 42.475,7.45 20.85,7.55 53.875,7.575 56.475,7.575 17.425,7.7 0.55,7.925 11.375,8 13.625,8 23.5,8.15 25.825,8.15 28.3,8.15 30.575,8.15 33.125,8.15 35.275,8.15 37.725,8.15 40.225,8.15 43,8.15 8.6,8.2 4.75,8.35 47.6,8.475 53.875,8.725 56.475,8.725 17.45,8.975 1.5,9.4 2.65,9.425 14.175,9.8 50.8,9.85 53.875,9.875 56.475,9.875 61.525,9.875 6.85,10 9.4,10 11.225,10.05 64.275,10.175 17.4,10.25 21.175,10.25 58.4,10.25 4.7,10.65 0.55,10.7 23.7,10.825 28.5,10.85 33.275,10.875 35.725,10.875 42.825,10.875 47.6,10.875 38.45,10.925 15.975,10.95 22.325,10.95 53.875,11.025 56.475,11.025 17.4,11.65 21.15,11.65 1.5,11.7 2.65,11.725 5.3,11.85 7.525,11.85 9.175,11.875 11.775,11.9 14.325,11.9 46.2,12.975 41.9,13.025 37.775,13.05 50.425,13.275 26.35,13.35 28.825,13.35 31.375,13.35 23.825,13.375 33.925,13.375 7.75,13.4 9.525,13.4 12.775,13.4 16,13.4 21.2,13.4 64.45,13.4 36.275,13.425 54.375,13.45 57.95,13.45 0.55,13.475 61.775,13.55 18.7,13.6 4.925,13.825 1.5,14 49.175,14.6 39.375,14.625 41.8,14.7 44.5,14.7 53,14.725 57.2,14.725 60.65,14.725 6.275,14.85 7.8,14.85 47.125,14.875 37.45,14.9 11.9,15.225 23.8,15.25 26.95,15.25 29.9,15.25 32.8,15.25 35.475,15.25 16.575,15.5 18.7,15.525 21.175,15.575 64.45,15.675 46.45,15.825 44.85,15.85 4.925,16.2 0.55,16.25 48.65,16.45 54.75,16.825 58.35,16.825 21.2,16.875 51.575,16.95 6.275,17 62.075,17 47.65,17.1 7.8,17.3 1.5,17.45 18.7,17.45 50.275,18.075 57,18.075 64.45,18.1 3.5,18.175 60.675,18.225 46.8,18.25 48.9,18.275 53.425,18.575 24.525,18.8 34.5,18.8 36.9,18.8 39.1,18.8 41.3,18.8 27.95,18.825 42.85,18.825 30.2,18.85 32.35,18.85 4.425,18.95 0.55,19.025 58.075,19.125 6.35,19.15 18.7,19.4 48.375,19.65 50.225,19.675 51.85,19.675 7.8,19.725 27.375,19.8 29.225,19.8 31.1,19.8 54.8,19.8 56.5,19.8 32.95,19.85 36.475,19.85 41.25,19.85 43.275,19.85 34.825,19.875 39,19.875 61.4,19.875 62.65,19.875 63.9,19.875 59.8,19.975 11.9,20.05 46.775,20.1 16.575,20.275 41.275,20.575 43.275,20.575 54.95,20.575 56.8,20.575 52.75,20.6 51.3,20.7 60.8,20.725 62,20.725 63.2,20.725 64.4,20.725 49.425,20.75 24.5,20.775 4.825,20.8 22.25,20.85 1.5,20.9 2.4,20.975 58,21.075 59.15,21.075 60.25,21.325 18.7,21.35 53.725,21.575 55.475,21.575 51.5,21.625 0.55,21.8 27.325,21.8 42.025,21.825 43.35,21.825 52.6,21.95 56.8,22.025 60.25,22.125 28.45,22.4 31.1,22.4 33.975,22.4 36.925,22.4 40.05,22.4 3.5,22.45 44.075,22.575 51.65,22.65 54.475,22.75 58,22.8 53.475,22.825 55.85,22.825 59.15,22.825 60.225,22.925 22.25,23.025 24.525,23.175 60.875,23.175 62,23.175 63.2,23.175 64.4,23.175 42.025,23.2 43.375,23.25 18.7,23.3 56.825,23.475 44.825,23.55 45.85,23.55 52.125,23.625 4.75,23.65 51.025,23.7 53.175,23.7 54.625,23.85 60.225,23.875 27.35,23.975 55.9,24.375 59.15,24.375 55.05,24.4 58,24.4 45.85,24.425 56.9,24.425 51.75,24.45 0.55,24.575 42,24.575 43.175,24.575 44.325,24.575 7.8,24.6 45.15,24.6 52.6,24.6 53.4,24.675 60.225,24.725 2.4,24.8 11.9,24.85 51.15,24.975 16.6,25.05 26.95,25.075 29.7,25.075 32.375,25.075 35.175,25.075 38.1,25.075 40.675,25.075 24.225,25.1 55.175,25.275 18.7,25.325 56.025,25.35 56.975,25.375 58.6,25.375 59.4,25.375 47.275,25.4 47.875,25.4 48.475,25.4 49.075,25.4 57.9,25.525 60.15,25.575 47.275,26 47.875,26 48.475,26 49.075,26 55.125,26.05 55.9,26.05 58.375,26.05 59.225,26.05 4.75,26.1 56.7,26.1 57.45,26.1 2.4,26.5 47.275,26.6 47.875,26.6 48.475,26.6 49.075,26.6 22.25,26.625 47.275,27.2 47.875,27.2 48.475,27.2 49.075,27.2 56.725,27.2 59.225,27.225 55.125,27.25 55.9,27.25 57.55,27.25 58.375,27.25 0.55,27.35 60.025,27.375 24.7,27.45 27.375,27.475 29.65,27.475 32.25,27.475 34.95,27.475 37.775,27.475 40.35,27.5 45.475,27.525 18.7,27.8 55.175,28.025 56.225,28.05 57.225,28.075 58.275,28.125 59.275,28.125 60.225,28.175 4.725,28.325 40.925,28.5 28.45,28.65 30.925,28.7 33.475,28.775 36.25,28.8 38.975,28.85 55.075,28.85 56.025,28.9 46.375,29.025 47,29.025 49.325,29.025 60.225,29.025 54.65,29.425 7.8,29.475 56.8,29.55 58.025,29.55 59.175,29.55 11.9,29.65 55.6,29.775 2.325,29.825 60.225,29.825 40.95,29.85 16.7,29.875 53.475,29.975 22.2,30 27.325,30.025 0.55,30.125 62,30.125 63.2,30.125 64.45,30.125 60.875,30.175 54.5,30.25 24.95,30.35 4.75,30.5 52.65,30.525 51.55,30.55 60.225,30.575 39.65,30.85 41.375,30.9 56.8,30.975 58.025,30.975 59.175,30.975 3.1,31 28.45,31.05 55.575,31.05 53.475,31.075 36,31.1 32,31.15 54.475,31.175 27.425,31.275 52.45,31.35 60.225,31.375 51.55,31.475 18.7,31.5 48.925,31.65 42.35,31.725 43.65,31.75 49.475,32 44.3,32.075 60.25,32.125 53.475,32.2 54.475,32.275 50.7,32.325 51.625,32.325 52.575,32.325 55.65,32.325 56.9,32.35 58.025,32.375 40.975,32.425 59.175,32.425 43.45,32.525 60.8,32.575 62,32.575 63.2,32.575 64.45,32.625 49.475,32.675 27.425,32.825 4.975,32.85 0.55,32.9 2.4,32.9 42.525,32.925 53.05,32.975 22.225,33.25 43.45,33.375 61.4,33.375 62.65,33.375 63.9,33.4 53.475,33.525 54.475,33.525 55.7,33.525 59.9,33.525 57.075,33.6 58.425,33.625 24.95,33.7 44.275,33.875 45.5,33.875 46.725,33.875 42.675,33.9 49.725,33.9 50.75,33.9 51.825,33.9 52.875,33.9 18.7,33.95 28.45,34 32,34 36,34 39.95,34 47.75,34.05 27.425,34.075 7.8,34.375 53.475,34.425 11.9,34.45 43.55,34.45 50.25,34.45 51.3,34.45 46.1,34.475 52.325,34.475 44.95,34.5 16.7,34.6 47.2,34.625 49.35,34.675 48.25,34.7 64.45,34.825 61.1,35.05 54.475,35.075 56.575,35.1 58.05,35.175 4.625,35.325 2.4,35.375 53.475,35.5 0.55,35.675 27.45,36 22.25,36.35 18.7,36.4 4.75,36.65 53.475,36.7 54.475,36.7 25.05,36.75 56.6,36.775 32,36.9 39.1,36.9 42.45,36.9 45.6,36.9 48.95,36.9 52,36.9 35.625,36.925 28.45,36.95 64.45,37.05 21.875,37.575 2.5,37.75 4.625,37.85 27.45,38 61.1,38.05 57.9,38.075 35.125,38.2 41.325,38.2 43.05,38.2 46.975,38.2 37.025,38.225 45,38.225 48.975,38.225 51.025,38.25 30.85,38.275 33.1,38.275 53.225,38.275 54.675,38.275 56.025,38.275 29.075,38.3 39.075,38.3 24.4,38.35 0.55,38.625 18.7,38.825 6,38.9 49.825,39.025 52.4,39.025 54.025,39.025 56.75,39.025 33.425,39.05 36.625,39.05 40.025,39.05 46.5,39.05 27.45,39.075 30.35,39.075 43.175,39.075 7.8,39.25 11.9,39.275 64.45,39.35 16.7,39.375 23.65,39.375 2.375,39.5 4.525,39.525 21.875,40.3 26.3,40.375 30.1,40.375 34.3,40.375 38.2,40.375 41.85,40.375 45.7,40.375 49.55,40.4 4.625,41.15 55.575,41.15 18.7,41.2 25.55,41.25 51.85,41.275 0.55,41.4 29.55,41.5 33,41.5 36.5,41.5 40.125,41.5 43.775,41.5 47.7,41.5 2.375,41.575 64.45,41.6 57.525,41.65 60.95,41.675 6.275,42.05 21.9,43.075 18.15,44.025 5,44.075 2.375,44.1 7.8,44.125 11.9,44.125 15.875,44.125 25.925,44.125 29.475,44.125 33,44.125 36.55,44.125 40.125,44.125 43.675,44.125 47.25,44.125 51.3,44.125 0.55,44.175 55.225,44.225 58.475,44.425 63.8,44.775 20.9,44.95 23.9,45.075 60.975,45.45 5.675,45.675 2.6,46.5 4,46.75 0.55,46.95 10.3,47.025 13.55,47.025 16.075,47.025 20.85,47.025 23.05,47.025 25.85,47.025 7.1,47.05 29.45,47.05 33.075,47.05 36.725,47.05 40.35,47.05 44,47.05 47.65,47.05 51.3,47.125 18.45,47.15 54.7,47.3 17.3,47.8 58.4,47.8 62.2,47.825 27.925,48.025 34.875,48.025 3.65,48.05 31.325,48.05 1.925,48.075 19.65,48.35 38.125,48.45 33.625,49.15 37.125,49.15 50.65,49.375 23.3,49.5 27.35,49.5 30.1,49.5 32.4,49.525 25.45,49.55 6.475,49.6 10.25,49.6 13.475,49.6 16.575,49.6 20,49.6 40.55,49.6 43.95,49.6 47.35,49.6 1.95,49.7 55.875,49.7 0.55,49.725 59.625,50.425 52.5,50.675 49,50.775 3.825,51.5 6.575,51.5 8.925,51.5 11.65,51.5 14,51.5 16.725,51.5 21.8,51.5 24.15,51.5 27.5,51.5 30.8,51.5 33.15,51.5 35.875,51.5 38.225,51.5 40.95,51.5 43.3,51.5 46.025,51.5 56.85,51.925 20.3,52.05 0.55,52.75 3.525,52.75 6.675,52.75 9.9,52.75 13.125,52.75 16.35,52.75 19.725,52.75 23.1,52.75 26.45,52.75 29.825,52.75 33.25,52.75 36.6,52.75 40.1,52.75 43.525,52.75 46.95,52.75 50.325,52.75 53.625,52.75
  other v2: 52.675,25.3 50.65,25.55 51.325,25.575 52,25.575 53.35,25.575 54.075,25.575 52.675,26.425 53.75,26.575 51.55,27.05 52.65,27.15 53.75,27.55 51.925,28.05 52.675,28.275 53.425,28.35 53.25,28.9 52.925,29.4 51.55,29.425 52.55,29.775 52.1,30.1
I2C_SCL: I2C.1 J2.10 R6.1 | length 9.5
  Top Layer w0.2: 2.64,47.7 J2.10 ; 2.65,47.7 3.5,46.85 3.5,46.025 ; I2C.1 3.5,46.025 ; R6.1 3.5,46.025
I2C_SDA: I2C.2 J2.9 R5.1 | length 11.5
  Top Layer w0.2: I2C.2 3.5,40.796 4.5,41.796 v3(4.5,44.725) R5.1
  MidLayer2 w0.2: v3(4.5,44.725) 4.5,50.1 J2.9@5.175,50.775
MISO: J2.5 U1.16 | length 71
  Top Layer w0.2: v1(48.425,23.65) U1.16
  MidLayer2 w0.2: J2.5 15.34,49.01 19.95,44.4 19.95,19.87 23.32,16.5 27.175,16.5 ; 26.25,16.5 43.76,16.5 45.575,18.315 45.575,20.597 46.403,21.425 48.084,21.425 49.45,22.791 49.45,23.175 48.975,23.65 v1(48.425,23.65) v1@48.425,23.578 ; v1@48.425,23.575 v1@48.428,23.578
MOSI: J2.4 U1.17 | length 69
  Top Layer w0.2: v1(48.927,22.975) U1.17@48.927,24.398
  MidLayer2 w0.2: J2.4 17.875,50.795 17.875,46.975 20.3,44.55 20.3,20.015 23.465,16.85 25.725,16.85 ; 23.825,16.85 43.615,16.85 45.225,18.46 45.225,20.758 46.242,21.775 47.75,21.775 v1@48.95,22.975
NetANT_1: ANT.1 C10.2 L5.2 | length 0.6
  Top Layer w0.24: L5.2 C10.2
NetC8_1: C8.1 C9.2 L5.1 | length 2.7
  Top Layer w0.24: C8.1 C9.2 L5.1
NetC8_2: C8.2 U2.5 | length 0.6
  Top Layer w0.24: U2.5 C8.2
NetC14_1: C14.1 R4.1 U2.6 | length 1.8
  Top Layer w0.2: R4.1 C14.1 U2.6
NetC15_1: C15.1 R3.1 U2.4 | length 1.9
  Top Layer w0.2: R3.1 C15.1 U2.4
NetC16_2: C16.2 L8.1 R18.1 U1.1
  other v3: 50.825,30.55 45.45,30.8 50.825,31.35 45.45,31.575 45.075,32.275
NetC17_2: C17.2 L7.1 L8.2 U1.7
NetFR0_2: FR0.2 FR1.2 J4.2 | length 3.7
  Top Layer w0.3: J4.2 37,2.58 37,5.075 FR1.2@38.111,5.075
NetJ4_3: J4.3 SX1261.2 SX1262.2 | length 3.7
  Top Layer w0.3: J4.3 39.58,5.055 SX1261.2@39.6,5.075 ; SX1261.2@39.58,5.075 40.625,5.075 SX1262.2@40.675,5.025
NetL1_1: L1.1 U1.23 U3.1 | length 1.4
  Top Layer w0.25: U1.23 50.6,27.05 L1.1
NetL7_2: L7.2 U1.9
NetU1_21: U1.21 U3.4 | length 2
  Top Layer w0.25: U1.21@50.05,26.05 U3.4
NetU1_22: U1.22 U3.3 | length 2
  Top Layer w0.25: U1.22 U3.3
NetU2_1: U2.1 U3.8 | length 0.8
  Top Layer w0.24: U3.8 U2.1
NetU2_3: U2.3 U3.6 | length 0.9
  Top Layer w0.24: U3.6 53.975,26.05 U2.3
NSS: J1.8 U1.19 | length 74.6
  Top Layer w0.2: U1.19 50.325,25.05 50.525,24.85 v1(50.525,24.55)
  MidLayer2 w0.2: J1.8@29.425,50.8 J1.8 27.875,50.8 20.65,43.575 20.65,42.8 20.65,20.16 23.61,17.2 43.47,17.2 44.875,18.605 44.875,20.903 46.097,22.125 47.05,22.125 v1(47.4,22.475)
  Bottom Layer w0.2: v1(47.4,22.475) 48.35,21.525 50.65,21.525 51.125,22 51.125,22.85 50.525,23.45 v1(50.525,24.55)
OPT: J4.4 XTAL.2 | length 2.5
  Top Layer w0.3: XTAL.2@42.1,5.075 42.1,2.56 J4.4
SCK: J2.6 U1.18 | length 72
  Top Layer w0.2: U1.18 v1(49.875,24.4)
  MidLayer2 w0.2: J2.6 12.85,50.8 12.875,50.775 13.075,50.775 19.6,44.25 19.6,19.725 23.175,16.15 27,16.15 43.905,16.15 45.925,18.17 45.925,20.452 46.548,21.075 48.275,21.075 49.875,22.675 v1(49.875,24.4)
SX_NRESET: J4.1 U1.15 | length 34.2
  Top Layer w0.2: v1(47.925,23.075) U1.15
  MidLayer2 w0.2: J4.1 34.5,10.725 39.575,15.8 44.05,15.8 46.275,18.025 46.275,20.307 46.693,20.725 48.65,20.725 v1(50.3,22.375)
  Bottom Layer w0.2: J4.1 J4.1@34.525,2.565 ; v1(47.925,23.075) 48.625,22.375 v1(50.3,22.375)
VDD_3V3: ANA_A5_A6.3 C21.2 DIO_D9_D10.3 FR0.1 I2C.3 R2.1 R5.2 R6.2 SX1261.1 XTAL.1 | length 85.4
  Top Layer w0.35: I2C.3 4.7,38.65 5.575,39.525 5.575,44.925 R5.2 R6.2
  Top Layer w0.65: DIO_D9_D10.3 1.6,25.65 ; I2C.3 2.325,38.65 1.6,37.925 1.6,25.65 ; ANA_A5_A6.3@3.525,12.625 7.025,12.625 ; v3@18.325,12.625 7.025,12.625 ; v3(22.25,7.8) 22.65,7.4 37.025,7.4 ; FR0.1@37,6.175 37,7.375 37.025,7.4 ; SX1261.1@39.58,6.175 39.58,7.38 39.6,7.4 ; XTAL.1@42.1,6.175 42.1,6.775 41.475,7.4 39.6,7.4 ; 1.6,25.65 1.6,22.85 7.025,17.425 7.025,12.625 ; 37.025,7.4 39.6,7.4
  Top Layer w0.8: ANA_A5_A6.3 ANA_A5_A6.3@3.525,12.625
  MidLayer2 w0.65: v3@18.375,12.625 v3(18.375,12.6) 18.375,11.675 v3(22.25,7.8)
VDD_MBED: C22.2 C23.2 J3.4 R1.2 R2.2
VDD_RADIO: C18.2 C20.2 R1.1 R18.2 U1.10 U1.11
VR_PA: C1.2 C2.2 L1.2 U1.24
XTA: Q1.3 U1.3 | length 6.8
  Top Layer w0.127: U1.3 48.425,28.775 v1(48.675,29.025)
  Top Layer w0.35: Q1.3 v1(48.85,34.025)
  MidLayer1 w0.127: v1(48.675,29.025) 48.675,29.325 48.45,29.55 48.45,33.65 v1@48.838,34.037
XTB: Q1.1 U1.4 | length 4.5
  Top Layer w0.127: v1(47.675,29.025) 47.925,28.775 U1.4
  Top Layer w0.35: v1(47.5,31.825) Q1.1
  MidLayer1 w0.127: v1(47.5,31.825) 47.875,31.45 47.875,29.522 47.675,29.322 v1(47.675,29.025)
pads on no net: J1.1 J1.2 J1.3 J1.5 J1.7 J2.8 J3.1 J3.2 J3.3 J3.5 J3.8

## Polygon pours and split planes (outlines as drawn)
GND on MidLayer2 "GND midlayer2" (solid, pour order 8): 0.25,0.25 64.75,0.25 64.75,53.05 0.25,53.05
GND on MidLayer1 "GND midlayer1" (solid, pour order 9): 0.25,0.25 64.75,0.25 64.75,53.05 0.25,53.05
GND on Bottom Layer "Bottom GND" (solid, pour order 10): 0.25,0.25 64.75,0.25 64.75,53.05 0.25,53.05
GND on Top Layer "Top GND" (solid, remove dead copper, pour order 7): 0.25,0.25 64.75,0.25 64.75,53.05 0.25,53.05

## Keep-outs
Keep-Out Layer:
  the board outline again, w0.05

## Other copper
Top Layer:
  pour cut-out: 52.675,29.225 52.875,29.225 52.875,29.075 52.675,29.075
  region net GND: 48.65,27.45 48.775,27.575 49.125,27.575 49.25,27.45 49.25,27.4 48.65,27.4
  region net GND: 47.1,27.45 47.225,27.575 47.575,27.575 47.7,27.45 47.7,27.4 47.1,27.4
  region net GND: 47,26.75 46.85,26.9 46.85,27.2 47,27.35 47.075,27.35 47.075,26.75
  region net GND: 49.325,25.85 49.45,25.725 49.45,25.375 49.325,25.25 49.275,25.25 49.275,25.85
  region net GND: 52.525,25.775 50.45,25.775 50.375,25.7 50.375,25.6 52.525,25.6
  region net GND: 51.775,29.825 52.175,29.825 52.175,29.475 51.775,29.475
  region net VR_PA: 51.5,28.2 51.925,28.625 52.725,28.625 52.725,29.025 51.7,29.025 51.025,29.025 50.725,28.725 50.725,28.2
  pour cut-out: 53.85,26.295 53.85,26.55 54,26.55 54,26.295
  region: 50.075,26.55
  region net GND: 54.3,26.775 54.3,26.525 53.985,26.525 53.85,26.39 53.85,26.325 53.575,26.325 53.575,26.775
  pour cut-out: 51.7,28.425 51.7,27.965 51.94,27.725 51.725,27.725 51.65,27.8 51.65,28.425
  pour cut-out: 51.95,25.375 51.95,24.95 52.35,24.95 52.35,25.375
  pour cut-out: 53,25.375 53,24.95 53.4,24.95 53.4,25.375
  pour cut-out: 52.95,28.15 52.95,27.8 53.35,27.8 53.35,28.15
  region net GND: 50.825,25 50.275,25.55 50.825,25.55
  region net NetANT_1: 59.525,26.825 59.45,26.75 59.45,26.55 59.525,26.475 60.125,26.475 60.125,26.825
  region net GND: 51.275,29.2 51.275,31.6 51.85,31.6 51.85,29.575 53.225,29.575 53.225,29.2
  region net GND: 57.45,26.38 57.575,26.38 57.575,26.325 60.012,26.325 60.175,26.162 60.175,25.875 57.45,25.875
  region net GND: 60.112,26.225 60.4,25.937 60.4,25.55 60.5,25.55 60.5,23.275 60,23.271 60,26.225
  region net GND: 54.85,25.95 54.85,26.325 55,26.325 55,25.95
  region net GND: 54.85,27.35 54.85,26.975 55.05,26.975 55.05,27.35
  region net GND: 37.875,5.8 37.875,6.9 38.375,6.9 38.375,5.8
  region net GND: 40.425,6.9 40.925,6.9 40.925,5.8 40.425,5.8
  pour cut-out: 43.725,33.6 43.725,32.6 45.875,32.6 45.875,28.425 50.425,28.425 50.425,32.625 52.775,32.625 52.775,33.625 49.8,33.625 49.725,33.55 49.725,31.375 46.975,31.375 46.975,33.6
  region net VR_PA: 50.875,28.8 51.525,28.8 51.525,28.225 50.85,28.225 50.75,28.325 50.75,28.675
  region net NetL1_1: 51.475,27.975 51.925,27.525 51.925,27.425 51.125,27.425 51.125,27.975
  region net NetC17_2: 43.075,28.15 43.075,29.6 43.4,29.925 45.35,29.925 45.35,28.975 45.725,28.6 45.725,28.15
  region net GND: 20.9,10.04 20.9,11.915 21.45,11.915 21.45,10.04
  region net GND: 20.6,6.15 20.6,7.85 21,7.85 21,6.15
  region net GND: 17.7,5.1 17.7,12.15 16.825,12.15 16.825,5.1
  region net GND: 50.425,32.625 50.425,31.825 53.1,31.825 53.1,32.625
  pour cut-out: 55.75,0.35 57.025,0.8 58.473,1.479 58.65,1.575 58.667,1.575 58.813,1.663 59.275,1.95 59.3,1.975 59.61,2.158 59.725,2.25 59.75,2.275 60.225,2.625 60.3,2.7 60.325,2.725 60.698,3.027 60.773,3.102 61.898,4.227 62.011,4.339 62.706,5.196 62.851,5.399 63.175,5.95 63.3,6.15 63.55,6.55 63.664,6.781 63.85,7.1 63.935,7.332 64.103,7.673 64.225,8 64.338,8.304 64.468,8.653 64.563,8.92 64.669,9.193 64.75,9.4 64.9,9.4 64.9,0.2 64.875,0.175 55.725,0.175 55.725,0.35 55.75,0.375
  pour cut-out: 55.725,53.05 57.675,52.2 57.798,52.146 58.075,52.026 58.25,51.925 58.581,51.735 58.745,51.641 59.075,51.45 59.175,51.375 59.425,51.225 59.55,51.15 59.9,50.9 60.002,50.827 60.525,50.425 60.6,50.35 60.625,50.325 61.125,49.925 61.475,49.575 61.5,49.525 61.525,49.5 61.825,49.2 61.875,49.125 61.9,49.1 62.1,48.825 62.15,48.775 62.6,48.25 62.7,48.1 62.975,47.725 63.05,47.6 63.3,47.2 63.379,47.052 63.575,46.74 63.65,46.6 63.834,46.255 63.899,46.075 64.05,45.75 64.15,45.5 64.229,45.302 64.329,45.052 64.375,44.9 64.45,44.65 64.55,44.4 64.65,44.125 64.925,44.125 64.925,53.05 64.875,53.1 64.825,53.05
  region net VDD_RADIO: 19.15,22.9 23.3,27.05 24.475,27.05 24.475,25.95 20.725,22.2 19.85,22.2
  region net VDD_RADIO: 42.75,26.425 43.05,26.125 42.75,26.125
  region net VDD_RADIO: 23.35,27.05 40.525,27.05 41.355,27.88 41.355,30.305 42.375,31.325 43.7,31.325 43.7,30.125 43.3,30.125 42.85,29.675 42.85,26.2 44.825,26.2 44.825,25.526 44.3,25 41.355,25 40.839,25.501 23.35,25.501
  region net NetC16_2: 43.85,31.325 45.775,31.325 45.775,30.125 43.85,30.125
  region: 19.125,22.747
  region net VDD_RADIO: 19.15,22.905 20.75,22.905 20.75,9.525 20.475,9.25 19.15,9.25
  region net VDD_3V3: 18.85,9.248 18.85,12.675 18.575,12.95 17.877,12.95 17.625,12.698 17.625,12.473 17.877,12.221 17.877,9.248
  region net VDD_MBED: 18.575,1.725 19.675,1.725 20.425,2.475 20.425,8.7 17.875,8.7 17.875,2.425
  region net NetC16_2: 44.725,32.6 44.725,30.325 45.775,30.325 45.775,32.275 45.45,32.6
  region net GND: 48.775,27.2 48.775,28.55 49.075,28.85 49.075,29.14 49.2,29.265 49.45,29.265 49.575,29.14 49.575,28.925 49.415,28.765 49.29,28.765 49.125,28.6 49.125,27.2
  region net GND: 47.575,28.55 47.275,28.85 47.275,29.15 47.15,29.275 46.25,29.275 46.1,29.125 46.1,28.925 46.275,28.75 47.05,28.75 47.225,28.575 47.225,27.2 47.575,27.2
  region net NetANT_1: 59.525,26.825 60.075,26.825 60.625,27.375 61.1,27.375 61.1,25.925 60.625,25.925 60.075,26.475 59.525,26.475
  pour cut-out: 64.8,23.475 60.5,23.475 60.5,29.825 64.8,29.825
  region net VR_PA: 50.45,27.55 50.45,27.7 50.975,28.225 51.525,28.225 51.525,28.775 50.775,28.775 49.775,27.775 49.775,27.7 49.75,27.675 49.75,27.55
  region net GND: 46.125,24.75 46.125,23.475 45.95,23.3 45.625,23.3 45.625,24.75
  region net GND: 49.075,25.75 51,25.75 51,25.35 49.075,25.35
  region net NetC16_2: 49.275,27.925 49.275,28.4 50.525,29.65 50.525,31.675 51.125,31.675 51.125,29.475 49.575,27.925
  region net GND: 44.675,27.95 44.675,27.225 45.425,27.225 45.775,26.875 47.275,26.875 47.275,27.25 45.9,27.25 45.725,27.425 45.725,27.675 45.45,27.95
  region net NetL7_2: 46.625,26.65 46.55,26.725 45.7,26.725 45.35,27.075 44.575,27.075 44.425,27.225 44.425,27.95 43.075,27.95 43.075,26.375 46.55,26.375 46.625,26.45
  region net NetC17_2: 44.825,29.65 45.075,29.65 46.525,28.2 46.525,27.55 45.875,27.55 45.875,27.8 44.824,28.851
  pour cut-out: 49.561,24.975 49.517,24.975 46.775,24.975 46.777,24.844 49.561,24.844
  pour cut-out: 49.561,24.925 49.425,24.925 49.425,27.625 46.75,27.625 46.75,27.749 49.555,27.752 49.557,27.75
  pour cut-out: 46.9,27.725 46.9,24.95 46.75,24.95 46.75,27.725
  region net VDD_RADIO: 44.65,25.4 46.275,25.4 46.275,25.7 45.975,25.7 45.925,25.75 45.925,25.85 45.975,25.9 46.275,25.9 46.275,26.2 44.65,26.2
  region net GND: 44.013,24.5 44.763,25.25 45.725,25.25 45.725,24.935 45.69,24.9 44.775,24.9 44.7,24.825 44.7,24.5
MidLayer2:
  pour cut-out: 43.725,33.6 43.725,32.6 45.875,32.6 45.875,29.8 50.425,29.8 50.425,32.625 52.775,32.625 52.775,33.625 49.8,33.625 49.725,33.55 49.725,31.375 46.725,31.375 46.725,33.525 46.65,33.6
  pour cut-out: 64.8,23.475 60.5,23.475 60.5,29.825 64.8,29.825
  pour cut-out: 55.625,53.075 58.75,51.675 60.292,50.624 62.35,48.6 62.475,48.4 62.868,47.845 62.975,47.7 63.222,47.323 63.332,47.154 63.475,46.875 63.55,46.775 63.7,46.5 63.773,46.324 63.889,46.069 63.985,45.855 64.115,45.595 64.2,45.35 64.285,45.104 64.375,44.9 64.418,44.722 64.47,44.573 64.521,44.424 64.6,44.15 64.65,44.033 64.725,43.8 64.8,43.625 64.9,43.625 64.9,53.075 64.875,53.1 64.85,53.075
  pour cut-out: 55.725,0.325 57.1,0.85 58.503,1.47 58.875,1.7 59.076,1.824 59.575,2.15 59.74,2.26 60.363,2.737 60.5,2.85 62.187,4.56 62.288,4.687 62.753,5.273 62.85,5.425 63.151,5.899 63.275,6.1 63.493,6.454 63.6,6.65 63.75,6.925 63.875,7.2 63.975,7.45 64.125,7.75 64.229,7.979 64.325,8.275 64.425,8.525 64.525,8.825 64.6,9.05 64.718,9.402 64.875,9.675 64.9,9.65 64.9,0.175 55.725,0.175
  region net GND: 46.775,27.7 46.775,24.9 49.575,24.9 49.575,27.7
MidLayer1:
  pour cut-out: 43.725,33.6 43.725,32.6 45.875,32.6 45.875,29.8 50.425,29.8 50.425,32.625 52.775,32.625 52.775,33.625 49.8,33.625 49.725,33.55 49.725,31.375 46.725,31.375 46.725,33.525 46.65,33.6
  pour cut-out: 64.8,23.475 60.5,23.475 60.5,29.825 64.8,29.825
  pour cut-out: 55.625,53.1 56.187,52.813 57.15,52.475 57.4,52.4 57.7,52.25 57.925,52.15 58.225,51.975 58.425,51.9 58.775,51.7 58.95,51.6 59.245,51.38 59.425,51.275 59.975,50.9 60.1,50.8 60.573,50.422 60.647,50.347 61.425,49.6 61.776,49.218 61.847,49.147 62.425,48.475 62.5,48.375 62.875,47.875 62.95,47.75 63.175,47.4 63.25,47.3 63.43,47.003 63.493,46.846 63.7,46.5 63.775,46.325 63.904,46.077 64.025,45.825 64.125,45.575 64.2,45.375 64.275,45.175 64.376,44.925 64.45,44.675 64.6,44.225 64.65,44.075 64.725,43.85 64.775,43.75 64.85,43.725 64.85,53.1 55.625,53.1 55.924,52.947 56.1,52.9 56.318,52.758 56.675,52.7 56.775,52.65 56.925,52.625
  pour cut-out: 55.775,0.325 55.895,0.362 56.1,0.45 56.275,0.525 56.356,0.56 56.544,0.64 56.697,0.706 56.925,0.775 57.1,0.85 57.296,0.934 57.903,1.194 57.923,1.198 58.099,1.278 58.225,1.35 58.25,1.35 58.499,1.478 58.6,1.55 58.847,1.705 59,1.8 59.25,1.95 59.35,2 59.382,2.039 59.468,2.093 59.575,2.15 59.9,2.4 60.015,2.488 60.7,3.025 60.75,3.075 61.35,3.675 61.375,3.7 62.1,4.45 62.186,4.539 62.675,5.15 62.75,5.275 62.975,5.6 63.058,5.72 63.225,6 63.3,6.1 63.45,6.375 63.527,6.506 63.7,6.8 63.782,6.996 63.875,7.2 63.944,7.353 64.025,7.525 64.12,7.727 64.2,7.925 64.272,8.101 64.35,8.3 64.435,8.546 64.5,8.75 64.58,8.999 64.628,9.149 64.7,9.35 64.7,9.525 64.789,9.575 64.9,9.6 64.875,9.575 64.875,0.175 55.775,0.175
  region net GND: 46.732,27.825 46.732,24.8 49.675,24.8 49.675,27.825
Bottom Layer:
  pour cut-out: 43.725,33.6 43.725,32.6 45.875,32.6 45.875,29.8 50.425,29.8 50.425,32.625 52.775,32.625 52.775,33.625 49.8,33.625 49.725,33.55 49.725,31.375 46.725,31.375 46.725,33.525 46.65,33.6
  pour cut-out: 55.6,53.05 56.8,52.6 58.6,51.775 58.75,51.675 59.05,51.5 59.171,51.394 59.604,51.106 59.725,51.025 60.275,50.625 60.375,50.525 62.196,48.722 62.312,48.587 62.775,47.975 62.83,47.88 63.05,47.55 63.17,47.395 63.387,47.037 63.465,46.91 63.6,46.675 63.6,46.65 63.666,46.559 63.775,46.325 63.869,46.122 63.999,45.849 64.099,45.625 64.2,45.35 64.262,45.18 64.32,45.023 64.385,44.845 64.448,44.674 64.529,44.451 64.575,44.325 64.664,44.08 64.7,43.925 64.775,43.7 64.85,43.675 64.9,53.1 55.6,53.1
  pour cut-out: 55.75,0.325 56.975,0.775 58.588,1.562 58.775,1.675 59.213,1.938 59.418,2.061 60.025,2.475 60.406,2.735 61.811,4.173 62.413,4.862 62.867,5.481 62.979,5.621 63.25,6.05 63.337,6.237 63.575,6.625 63.709,6.844 63.875,7.2 63.992,7.468 64.125,7.775 64.22,8.077 64.334,8.332 64.437,8.594 64.516,8.794 64.625,9.15 64.678,9.324 64.763,9.6 64.925,9.625 64.9,9.6 64.9,0.175 55.775,0.175 55.75,0.2
  region net NetC16_2: 44.725,32.6 44.725,29.425 51.125,29.425 51.125,31.675 50.525,31.675 50.525,29.8 45.775,29.8 45.775,32.6
  region net GND: 46.725,27.7 46.725,24.9 49.625,24.9 49.625,27.7

## Silkscreen, mask and mechanical layers (free items; w line width, h text height)
Top Overlay:
  lines w0.15: 55.8,26.1 55.8,23.625 42.75,23.625 42.75,34.125 55.8,34.125 55.8,27.225
  text "1" at 48.55,50.375 h1
  text "1" at 26.925,50.325 h1
  text "J2" at 24.175,48 h1.27
  text "J1" at 46.225,48 h1.27
  text "Sensors" at 1.1,47.4 h1.4
  text "SX126xMB2xAS mbed shield" at 23.3,44.25 h1.5
  text "SCL SDA" at 6.5,44 h0.8 r270
  text "PCB_E588V01A 4819" at 31,41.25 h1.27
  text "SX1261/2" at 45.35,34.625 h1.4
  text "D9 D10" at 6.5,30.5 h0.8 r270
  text "A5 A6" at 6.5,17.5 h0.8 r270
  text "Freq Band:" at 49.75,12.625 h1.27
  text "For Evaluation only" at 0.55,5.45 h0.9
  text "Not FCC approved for resale" at 0.55,3.95 h0.9
  text "1" at 9.75,2.2 h1
  text "1" at 32.85,2.2 h1
  text "J3" at 8.25,0.475 h1.27
  text "J4" at 31.375,0.475 h1.27
Bottom Overlay:
  text "RoHS" at 11.794,29.37 h2.2 r270
  text "compliant" at 10.244,27.32 h2.2 r270
  text "PCB_E588V01A 4819" at 0.75,17.7 h1.27 r270
Top Paste:
  region: 50.525,27.05
Bottom Solder:
  region: 46.875,27.6 46.875,25 49.475,25 49.475,27.6
Mechanical 3:
  text "Origin(0;0)" at -10.425,-1.9 h1
Mechanical 14:
  the board outline again, w0.05

## Dimensions
0,0 to 65,0 on Mechanical 3
0,53.3 to 0,0 on Mechanical 3
52.3,40.6 to 66.852,55.152 on Mechanical 3

## Text inside footprints (layer, text, board x,y; h text height)
Q1: Top Overlay "1" at 46.675,32.175 h0.5
Shield: Top Overlay "1" at 28.475,21.025 h1
U1: Top Overlay "1" at 49.975,28.825 h0.6